# Altium PCB Arduino-DUE-V03.PcbDoc (part 2 of 2)
Units mil, origin at the board's own origin, x right, y up, seen from the top; angles counter-clockwise.
Board outline 4000 x 2100 mil, 2 copper layers (Top, Bottom), stack 65.748 mil thick; 128 components, 163 nets, 632 pads, 387 vias.
Unrouted connection lines stored in the file: 4.
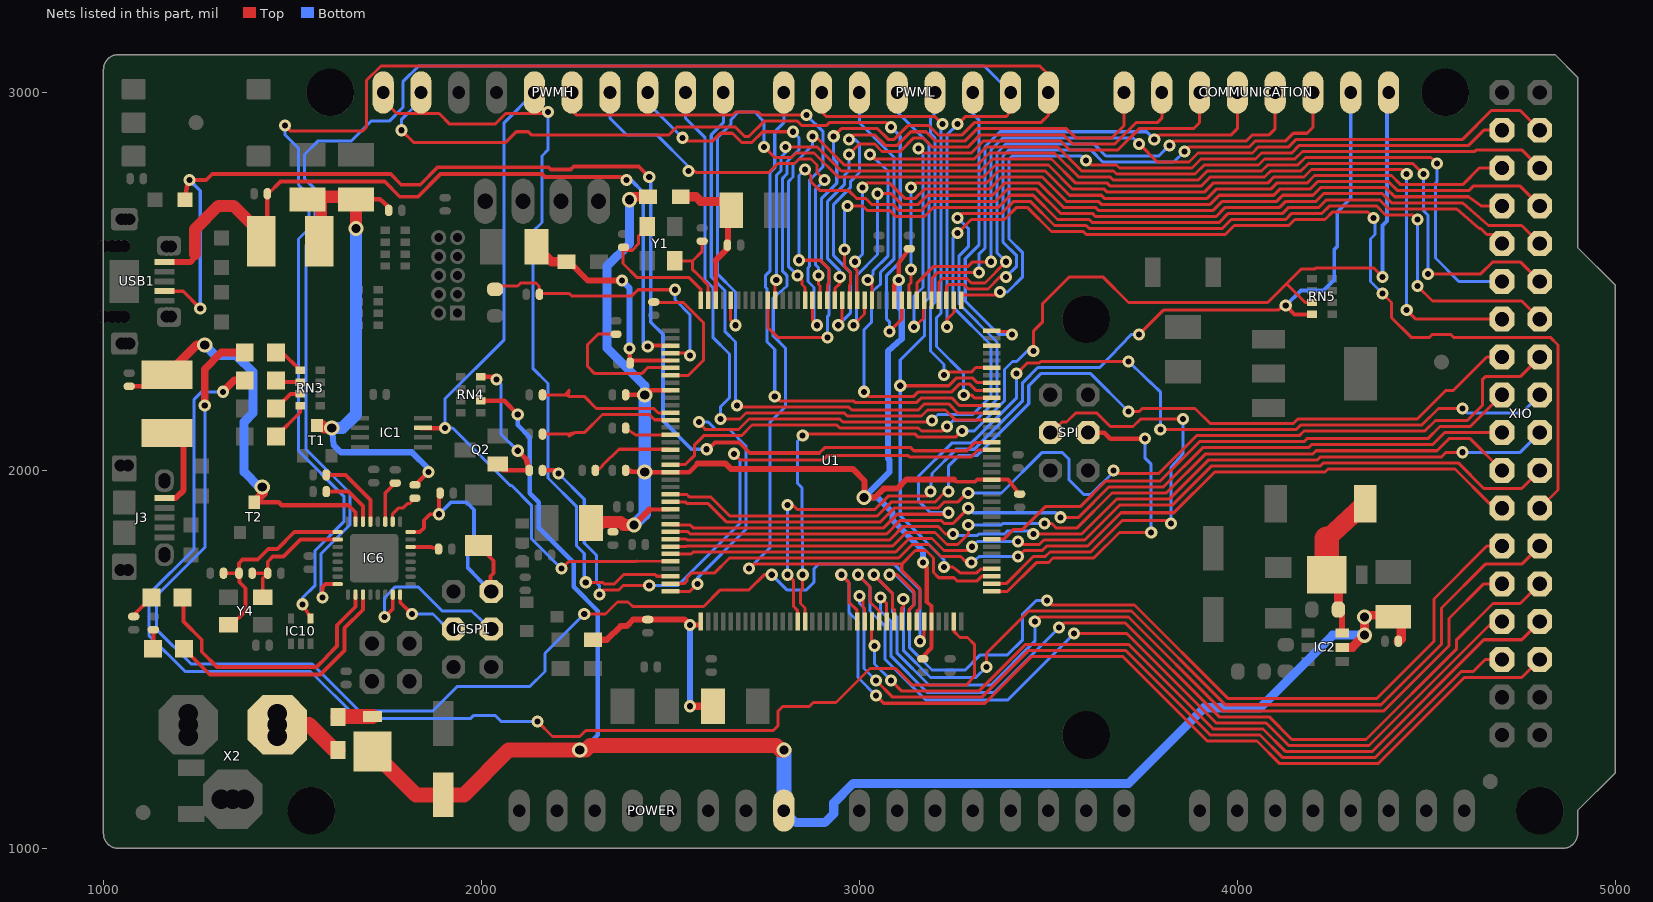
[diagram p2: the nets of this part, all layers, seen from the top]

## Via types
v1: diameter 32/32 (per signal layer), hole 16, Top to Bottom, 323 vias
v2: diameter 40/40 (per signal layer), hole 24, Top to Bottom, 64 vias

## Nets (pads, with @x,y where several pads share a name; then routed paths per layer and width w, separated by ;. In a path a pad name is that pad's centre, name@x,y a point inside that pad or via, vN(x,y) a via of type N, cw(c..) or ccw(c..) an arc to the next point about the centre after c; other vN are vias at no path point) (continued)
MOSI: SPI.4 U1.109 | length 903.2
  Top w8: U1.109@3350.2,1680.51 3352,1680 3392,1680 3468,1756 3500,1756 3512,1768 3620,1768 3688,1836 v1(3772,1836) ; SPI.4@3604,2100 SPI.4@3605,2100 3605,2101 SPI.4@3604,2100
  Top w12: SPI.4@3604,2100 3648,2100 3664,2084 v1(3756,2084)
  Bottom w8: v1(3756,2084) 3756,2032 3772,2016 v1(3772,1836)
MOSI2: IC6.16 ICSP1.4 | length 190.9
  Top w10: IC6.16@1784.9,1671.54 1784.9,1651.1 v1(1816,1620)
  Bottom w8: v1(1816,1620) 1872,1620 1912,1580 ICSP1.4@1925.94,1580
N$1: IC6.26 R21.1 | length 96.7
  Top w8: IC6.26@1765.21,1864.46 1765.21,1885.21 1780,1900 1792,1900 1804,1912 1809.59,1912 R21.1@1824,1926.5
N$2: L.A RN3.3 | length 79.9
  Top w10: L.A@1456.34,2164 1494.59,2202.25 RN3.3@1520.43,2202.25
N$3: ON.A RN3.4 | length 107.3
  Top w10: ON.A@1456.34,2090 1520.43,2154.09 RN3.4@1520.43,2170.76
N$4: R15.2 RX1.A | length 73.4
  Top w10: R15.2@1080,1613.5 1080,1617.34 RX1.A@1126.66,1664 1128,1664 RX1.A@1126.41,1665.59
N$5: R8.2 U1.51 | length 123.9
  Top w8: R8.2@2381.5,2112 2407.69,2093.9 U1.51@2499.8,2093.9
N$6: Q2.1 R3.2 RN4.8 | length 416.6
  Top w8: RN4.8@1998.57,2247.24 RN4.8@2000,2248
  Top w11: Q2.1@2043.31,2016.6 2040,2015.91 2040,2016 2056,2000 Q2.1@2068,2000
  Top w12: RN4.8@2000,2248 2032,2248 v1(2040,2240) ; Q2.1@2068,2000 R3.2@2126.5,2000 R3.2@2128,2000
  Top w14: v1(2096,2052) 2118.41,2029.59 R3.2@2126.5,2000
  Bottom w8: v1(2040,2240) 2052,2228 2052,2096 v1(2096,2052)
N$7: R4.1 U1.53 | length 222.4
  Top w8: R4.1@2301.5,2000 2308,2000 2320,2012 2320,2014 2364,2056 2496,2056 U1.53@2499.8,2054.53
N$10: D5.P$2 L6.1 | length 92.7
  Top w40: L6.1@1620,1347.31 1621.65,1348.96 D5.P$2@1712,1348.96
N$11: R5.2 U1.43 | length 380.5
  Top w8: R5.2@2456,2445.5 R5.2@2446.5,2444 ; U1.43@2499.8,2251.38 2547.38,2251.38 2588,2292 2588,2390 2534,2444 R5.2@2446.5,2444 ; R5.2@2446,2444 R5.2@2446.5,2444 ; R5.2@2446,2444 R5.2@2446.5,2444 ; R5.2@2446,2444 R5.2@2446.5,2444 ; R5.2@2446,2444 R5.2@2446.5,2444 ; R5.2@2446,2444 R5.2@2446.5,2444 ; R5.2@2446,2444 R5.2@2446.5,2444 ; R5.2@2446,2444 R5.2@2446.5,2444 ; R5.2@2446,2444 R5.2@2446.5,2444
N$12: R6.2 U1.42 | length 378.6
  Top w8: R6.2@2356,2360.5 2308.5,2360.5 2280,2332 2280,2276 2300,2256 2424,2256 2440,2272 2496,2272 U1.42@2499.8,2271.06
N$14: R14.2 TX1.A | length 51.1
  Top w10: TX1.A@1130.66,1528 1132,1529.34 R14.2@1132,1578.5
N$54: RN3.1 RX.A | length 83.6
  Top w10: RX.A@1456.34,2312 1471.09,2313.24 RN3.1@1520.43,2265.24
N$55: RN3.2 TX.A | length 52.3
  Top w10: TX.A@1468.09,2233.75 RN3.2@1520.43,2233.75
PIN22: U1.1 XIO.3 | length 1886.7
  Top w8: U1.1@3269.49,2450.2 3268,2464 3364,2464 v1(3372,2472) ; v1(3600,2820) 3612,2808 3680,2808 3688,2800 3880,2800 3904,2824 4048,2824 4064,2840 4144,2840 4164,2860 4612,2860 4652,2900 XIO.3@4700,2900
  Bottom w8: v1(3372,2472) 3392,2472 3432,2512 3432,2576 3396,2612 3396,2824 3404,2832 3588,2832 v1(3600,2820)
PIN23: U1.7 XIO.4 | length 2130.1
  Top w8: U1.7@3151.38,2450.2 3152,2456 3152,2495 3197,2540 3288,2540 3300,2552 v1(3348,2552) ; v1(3740,2864) 3788,2816 3872,2816 3896,2840 4040,2840 4056,2856 4136,2856 4156,2876 4596,2876 4672,2952 4748,2952 XIO.4@4800,2900
  Bottom w8: v1(3348,2552) 3348,2848 3380,2880 3724,2880 v1(3740,2864)
PIN24: U1.8 XIO.5 | length 1964.7
  Top w8: U1.8@3131.69,2450.2 3131.69,2491.69 3136,2496 v1(3136,2532) ; v1(3136,2748) 3148,2760 3336,2760 3368,2792 3492,2792 3556,2728 3640,2728 3648,2720 3920,2720 3944,2744 4088,2744 4104,2760 4184,2760 4204,2780 4408,2780 4432,2756 4596,2756 4640,2800 XIO.5@4700,2800
  Bottom w8: v1(3136,2532) v1(3136,2748)
PIN25: U1.13 XIO.6 | length 2300.3
  Top w8: v1(3022,2504) 3033,2493 3033,2455 U1.13@3033.27,2450.2 ; v1(3028,2836) 3040,2824 3304,2824 3336,2856 3524,2856 3588,2792 3672,2792 3680,2784 3888,2784 3912,2808 4056,2808 4072,2824 4152,2824 4172,2844 4628,2844 4632,2848 4752,2848 XIO.6@4800,2800
  Bottom w8: v1(3022,2504) 3036,2518 3036,2528 3076,2568 3076,2792 v1(3028,2836)
PIN26: U1.14 XIO.7 | length 2212.4
  Top w8: v1(2984,2384) 3013.58,2413.58 U1.14@3013.58,2450.2 ; v1(3048,2732) 3084,2732 3112,2704 3156,2704 3180,2728 3352,2728 3384,2760 3476,2760 3540,2696 3624,2696 3632,2688 3936,2688 3960,2712 4104,2712 4120,2728 4200,2728 4220,2748 4392,2748 4416,2724 4612,2724 4644,2700 XIO.7@4700,2700
  Bottom w8: v1(2984,2384) 2992,2392 2992,2515 3048,2571 v1(3048,2732)
PIN27: U1.15 XIO.8 | length 2236.7
  Top w8: v1(2988,2552) 2988,2535 2993.9,2529.1 U1.15@2993.9,2450.2 U1.15@2993.9,2449.9 ; v1(3008,2748) 3020,2760 3080,2760 3120,2720 3148,2720 3172,2744 3344,2744 3376,2776 3484,2776 3548,2712 3632,2712 3640,2704 3928,2704 3952,2728 4096,2728 4112,2744 4192,2744 4212,2764 4400,2764 4424,2740 4612,2740 4624,2752 4748,2752 XIO.8@4800,2700
  Bottom w8: v1(2988,2552) 3008,2572 v1(3008,2748)
PIN28: U1.16 XIO.9 | length 2132.1
  Top w8: v1(2960,2584) 2960,2540 2976.21,2523.79 2976,2519.79 2976,2492 2974,2490 2974,2448.2 U1.16@2974.21,2450.2 ; v1(2968,2700) 3008,2700 3020,2688 3080,2688 3096,2672 3172,2672 3196,2696 3368,2696 3400,2728 3460,2728 3524,2664 3608,2664 3616,2656 3952,2656 3976,2680 4120,2680 4136,2696 4216,2696 4236,2716 4376,2716 4400,2692 4580,2692 4640,2640 4644,2640 4660,2624 4676,2624 XIO.9@4700,2600
  Bottom w8: v1(2960,2584) 2960,2692 v1(2968,2700)
PIN29: U1.19 XIO.10 | length 2548.9
  Top w8: v1(2840,2556) 2896,2556 2920,2532 2920,2496 2915.16,2491.16 U1.19@2915.16,2450.2 ; v1(2856,2796) 2872,2780 2872,2764 2896,2740 2972,2740 2992,2720 3016,2720 3032,2704 3088,2704 3104,2688 3164,2688 3188,2712 3360,2712 3392,2744 3468,2744 3532,2680 3616,2680 3624,2672 3944,2672 3968,2696 4112,2696 4128,2712 4208,2712 4228,2732 4384,2732 4408,2708 4596,2708 4664,2648 4752,2648 XIO.10@4800,2600
  Bottom w8: v1(2840,2556) 2840,2780 v1(2856,2796)
PIN30: U1.22 XIO.11 | length 2696.6
  Top w8: v1(2836,2516) 2848,2504 2848,2492 2856,2484 U1.22@2856,2448 ; v1(2876,2884) 2884,2884 2960,2808 3312,2808 3344,2840 3516,2840 3580,2776 3664,2776 3672,2768 3896,2768 3920,2792 4064,2792 4080,2808 4160,2808 4180,2828 4512,2828 v1(4528,2812) ; U1.22@2856,2448 U1.22@2856.1,2450.2 2856.1,2448.1 U1.22@2856,2448
  Bottom w8: v1(2836,2516) 2812,2540 2812,2764 2824,2776 2824,2808 2876,2860 v1(2876,2884) ; v1(4528,2812) 4528,2764 4524,2760 4524,2562 4586,2500 XIO.11@4700,2500
PIN31: U1.26 XIO.12 | length 2810.8
  Top w8: U1.26@2777.36,2450.2 2777,2461 2777,2501 v1(2780,2504) ; v1(2804,2856) 2888,2856 2952,2792 3320,2792 3352,2824 3508,2824 3572,2760 3656,2760 3664,2752 3904,2752 3928,2776 4072,2776 4088,2792 4168,2792 4188,2812 4464,2812 v1(4492,2784) ; v1(4504,2520) 4644,2520 4676,2552 4748,2552 XIO.12@4800,2500
  Bottom w8: v1(2780,2504) 2780,2780 2792,2792 2792,2828 2804,2840 v1(2804,2856) ; v1(4492,2784) 4492,2688 4504,2676 v1(4504,2520)
PIN32: U1.32 XIO.13 | length 3265.4
  Top w8: U1.32@2659.25,2450.2 2659.25,2396.75 v1(2672,2384) ; v1(2748,2856) 2776,2828 2820,2828 2832,2840 2880,2840 2944,2776 3328,2776 3360,2808 3500,2808 3564,2744 3648,2744 3656,2736 3912,2736 3936,2760 4080,2760 4096,2776 4176,2776 4196,2796 4436,2796 v1(4448,2784) ; v1(4448,2424) 4472,2400 XIO.13@4700,2400 XIO.13@4704,2400
  Bottom w8: v1(2672,2384) 2672,2472 2624,2520 2624,2880 2660,2916 2660,2928 2680,2948 2724,2948 2748,2920 v1(2748,2856) ; v1(4448,2424) v1(4448,2784)
PIN33: U1.55 XIO.14 | length 3348.4
  Top w8: U1.55@2499.8,2015.16 2504,2016 2540,2016 2564,2040 2564,2068 2588,2092 2688,2092 2716,2120 2940,2120 2948,2112 3156,2112 3164,2104 3220,2104 v1(3232,2116) ; v1(3260,2668) 3272,2680 3376,2680 3408,2712 3452,2712 3516,2648 3600,2648 3608,2640 3960,2640 3984,2664 4128,2664 4144,2680 4224,2680 4244,2700 4368,2700 4392,2676 4464,2676 v1(4476,2664) ; v1(4476,2488) 4516,2448 4752,2448 XIO.14@4800,2400
  Bottom w8: v1(3232,2116) 3248,2132 3308,2132 3364,2188 3364,2340 3264,2440 3264,2568 3288,2592 3288,2640 v1(3260,2668) ; v1(4476,2488) v1(4476,2664)
PIN34: U1.59 XIO.15 | length 2581.3
  Top w8: U1.59@2499.8,1936.42 2504,1936 2544,1936 2550,1930 2606,1930 2656,1880 3048,1880 3084,1916 3200,1916 3228,1944 v1(3236,1944) ; v1(3712,2156) 3740,2156 3748,2164 3888,2164 3928,2124 4148,2124 4160,2136 4476,2136 4552,2212 4572,2212 4660,2300 XIO.15@4700,2300
  Bottom w8: v1(3236,1944) 3236,2012 3264,2040 3312,2040 3448,2176 3448,2224 3480,2256 3612,2256 v1(3712,2156)
PIN35: U1.60 XIO.16 | length 2676
  Top w8: U1.60@2499.8,1916.73 2539.27,1916.73 2544,1912 2600,1912 2648,1864 3056,1864 3092,1900 3208,1900 3224,1916 3260,1916 3284,1940 v1(3288,1940) ; v1(3672,2000) 3680,1992 3792,1992 3892,2092 4164,2092 4176,2104 4496,2104 4524,2132 4608,2132 4648,2172 4648,2240 4656,2248 4748,2248 XIO.16@4800,2300
  Bottom w8: v1(3288,1940) 3376,1940 3484,2048 3536,2048 3554,2030 3554,1976 3574.67,1954.8 3593.47,1936 3612,1936 3672,1996 v1(3672,2000)
PIN36: U1.116 XIO.17 | length 1508.5
  Top w8: U1.116@3350.2,1818.31 3350.2,1817.8 3354,1818 3382,1818 3408,1844 3432,1844 3492,1904 3584,1904 3652,1972 3796,1972 3900,2076 4176,2076 4184,2084 4504,2084 4536,2116 4616,2116 XIO.17@4700,2200
PIN37: U1.63 XIO.18 | length 2901.1
  Top w8: U1.63@2499.8,1857.68 2504,1856 2552,1856 2560,1848 3064,1848 3100,1884 3232,1884 v1(3236,1888) ; v1(3416,2256) 3444,2284 3476,2284 3480,2288 v1(3712,2288) ; v1(3796,2108) 4156,2108 4168,2120 4488,2120 4532,2164 v1(4596,2164)
  Bottom w8: v1(3236,1888) 3188,1888 3156,1920 3156,1984 3244,2072 3296,2072 3416,2192 v1(3416,2256) ; v1(3712,2288) 3796,2208 v1(3796,2108) ; v1(4596,2164) 4608,2152 4752,2152 XIO.18@4800,2200
PIN38: U1.64 XIO.19 | length 2340.2
  Top w8: U1.64@2499.8,1837.99 2546.01,1837.99 2552,1832 3072,1832 3108,1868 3216,1868 3224,1860 3248,1860 v1(3288,1900) ; v1(3532,1876) 3580,1876 3660,1956 3804,1956 3908,2060 4188,2060 4196,2068 4516,2068 4548,2100 XIO.19@4700,2100
  Bottom w8: v1(3288,1900) 3300,1888 3520,1888 v1(3532,1876)
PIN39: U1.65 XIO.20 | length 2445.3
  Top w8: U1.65@2499.8,1818.31 2541.69,1818.31 2544,1816 3080,1816 3116,1852 3208,1852 3228,1832 v1(3248,1832) ; v1(3460,1832) 3588,1832 3680,1924 3820,1924 3924,2028 4212,2028 4220,2036 4540,2036 4552,2048 v1(4596,2048)
  Bottom w8: v1(3248,1832) 3252,1832 3256,1828 3312,1828 3316,1832 3384,1832 3392,1840 3452,1840 v1(3460,1832) ; v1(4596,2048) 4748,2048 XIO.20@4800,2100
PIN40: U1.66 XIO.21 | length 2403.7
  Top w8: U1.66@2499.8,1798.62 2542.62,1798.62 2544,1800 3088,1800 3124,1836 3200,1836 3232,1804 3260,1804 3288,1832 v1(3288,1856) ; v1(3490,1860) 3508,1860 3520,1848 3576,1848 3668,1940 3812,1940 3916,2044 4200,2044 4208,2052 4528,2052 4560,2084 4616,2084 XIO.21@4700,2000
  Bottom w8: v1(3288,1856) 3376,1856 3380,1860 v1(3490,1860)
PIN41: U1.67 XIO.22 | length 2481.2
  Top w8: U1.67@2499.8,1778.94 2554.94,1778.94 2560,1784 3096,1784 3132,1820 3192,1820 3224,1788 3288,1788 v1(3298,1798) ; v1(3420,1812) 3428,1804 3476,1804 3488,1816 3596,1816 3688,1908 3828,1908 3932,2012 4220,2012 4228,2020 4584,2020 4652,1952 4752,1952 XIO.22@4800,2000
  Bottom w8: v1(3298,1798) 3312,1812 v1(3420,1812)
PIN42: U1.71 XIO.23 | length 2412.6
  Top w8: U1.71@2499.8,1700.2 2536.2,1700.2 2544,1708 2544,1716 2556,1728 2616,1728 2656,1768 3104,1768 3140,1804 3184,1804 3216,1772 3268,1772 3284,1756 v1(3296,1756) ; v1(3420,1772) 3436,1788 3484,1788 3496,1800 3604,1800 3692,1888 3832,1888 3940,1996 4232,1996 4240,2004 4576,2004 4668,1912 4688,1912 XIO.23@4700,1900
  Bottom w8: v1(3296,1756) 3316,1772 v1(3420,1772)
PIN43: U1.72 XIO.24 | length 4370.4
  Top w8: U1.72@2499.8,1680.51 2496,1680 2552,1680 v1(2572,1700) ; v1(2576,2128) 2592,2108 2680,2108 2708,2136 2948,2136 2956,2128 3188,2128 v1(3192,2132) ; v1(3260,2628) 3296,2664 3384,2664 3416,2696 3444,2696 3508,2632 3592,2632 3600,2624 3968,2624 3992,2648 4136,2648 4152,2664 4232,2664 4252,2684 4344,2684 v1(4360,2668) ; v1(4384,2468) 4408,2444 4408,2404 4460,2352 4508,2352 4516,2360 4564,2360 4572,2352 4828,2352 4848,2332 4848,1948 XIO.24@4800,1900
  Bottom w8: v1(2572,1700) 2572,1716 2700,1844 2700,2064 2656,2108 2620,2108 2600,2128 v1(2576,2128) ; v1(3192,2132) 3208,2148 3300,2148 3348,2196 3348,2332 3248,2432 3248,2616 v1(3260,2628) ; v1(4360,2668) 4364,2664 4364,2624 4352,2612 4352,2500 v1(4384,2468)
PIN44: U1.101 XIO.25 | length 2449.9
  Top w8: v1(3080,1724) 3100,1724 3144,1680 3144,1644 3131.69,1631.69 U1.101@3131.69,1599.8 ; v1(3496,1656) 3508,1644 3728,1644 3976,1396 4368,1396 4520,1548 4520,1660 4660,1800 XIO.25@4700,1800
  Bottom w8: v1(3080,1724) 3096,1724 3144,1676 3144,1644 3132,1632 3132,1532 3192,1472 3280,1472 3320,1512 3392,1512 3432,1552 3432,1620 3468,1656 v1(3496,1656)
PIN45: U1.100 XIO.26 | length 2338.6
  Top w8: U1.100@3112.01,1599.8 3112,1600 3112,1636 3116,1640 v1(3116,1660) ; v1(3336,1480) 3336,1516 3448,1628 3720,1628 3968,1380 4380,1380 4540,1540 4540,1636 4656,1752 4752,1752 XIO.26@4800,1800
  Bottom w8: v1(3116,1660) 3116,1524 3188,1452 3308,1452 v1(3336,1480)
PIN46: U1.99 XIO.27 | length 2404.3
  Top w8: v1(3038,1724) 3088,1674 3088,1636 3092.32,1631.68 U1.99@3092.32,1599.8 ; v1(3464,1600) 3476,1612 3712,1612 3960,1364 4388,1364 4560,1536 4560,1608 4652,1700 XIO.27@4700,1700
  Bottom w8: v1(3038,1724) 3088,1674 3088,1624 3100,1612 3100,1516 3184,1432 3348,1432 3464,1548 v1(3464,1600)
PIN47: U1.98 XIO.28 | length 2383.2
  Top w8: v1(3056,1664) 3072,1648 3072,1600 U1.98@3072.64,1599.8 ; v1(3528,1584) 3540,1596 3704,1596 3952,1348 4084,1348 4144,1288 4340,1288 4580,1528 4580,1552 4676,1648 4748,1648 XIO.28@4800,1700
  Bottom w8: v1(3056,1664) 3056,1628 3084,1600 3084,1508 3180,1412 3356,1412 v1(3528,1584)
PIN48: U1.97 XIO.29 | length 2409.7
  Top w8: v1(2996,1724) 3028,1692 3028,1652 3052.95,1627.05 U1.97@3052.95,1599.8 ; v1(3568,1568) 3708,1568 3944,1332 4076,1332 4136,1272 4348,1272 4676,1600 XIO.29@4700,1600
  Bottom w8: v1(2996,1724) 3028,1692 3028,1628 3068,1588 3068,1500 3176,1392 3392,1392 v1(3568,1568)
PIN49: U1.96 XIO.30 | length 2216.5
  Top w8: U1.96@3033.27,1599.8 3032,1592 3032,1544 v1(3040,1536) ; v1(3084,1444) 3112,1416 3316,1416 3440,1540 3712,1540 3936,1316 4068,1316 4128,1256 4356,1256 4652,1552 4752,1552 XIO.30@4800,1600
  Bottom w8: v1(3040,1536) 3040,1488 v1(3084,1444)
PIN50: U1.95 XIO.31 | length 2266.8
  Top w8: v1(3000,1668) 3009.58,1658.58 3009.58,1638.42 3013,1635 U1.95@3013.58,1599.8 ; v1(3044,1444) 3088,1400 3324,1400 3448,1524 3704,1524 3928,1300 4060,1300 4120,1240 4364,1240 4592,1468 4624,1468 4656,1500 XIO.31@4700,1500
  Bottom w8: v1(3000,1668) 3000,1648 3012,1636 3012,1476 v1(3044,1444)
PIN51: U1.94 XIO.32 | length 2549
  Top w8: v1(2952,1724) 2972,1704 2972,1652 2993.9,1630.1 U1.94@2993.9,1599.8 U1.94@2992.2,1599.8 ; v1(3044,1404) 3064,1384 3332,1384 3456,1508 3696,1508 3920,1284 4052,1284 4112,1224 4372,1224 4600,1452 4752,1452 XIO.32@4800,1500
  Bottom w8: v1(2952,1724) 2972,1704 2972,1624 2996,1600 2996,1452 v1(3044,1404)
PWM2: PWML.3 U1.144 | length 807.7
  Top w8: U1.144@3350.2,2369.49 3344,2368 3396,2368 v1(3404,2360)
  Bottom w8: PWML.3@3300,3004 PWML.3@3300,3000 3300,2944 3316,2928 3316,2596 3280,2560 3280,2448 3368,2360 v1(3404,2360)
PWM3: PWML.4 U1.139 | length 912.4
  Top w8: v1(3224,2252) 3232,2260 3296,2260 3308,2272 3344,2272 U1.139@3350.2,2271.06
  Bottom w8: PWML.4@3200,3000 3200,2944 3188,2932 3188,2892 3200,2880 3200,2444 3188,2432 3188,2316 3224,2280 v1(3224,2252)
PWM5: PWML.6 U1.136 | length 1227.6
  Top w8: v1(3012,2208) 3024,2196 3144,2196 3156,2208 3244,2208 3264,2228 3292,2228 3308.01,2212.01 U1.136@3350.2,2212.01
  Bottom w8: PWML.6@3000,3000 3000,2920 3092,2828 3092,2560 3056,2524 3056,2492 3032,2472 3032,2392 3012,2372 v1(3012,2208)
PWM6: PWML.7 U1.135 | length 1214.6
  Top w8: PWML.7@2900,3000 2900,2949 2913,2936 3200,2936 v1(3220,2916) ; v1(3276,2200) 3296,2200 3304,2192 3344,2192 U1.135@3350.2,2192.32
  Bottom w8: v1(3220,2916) 3216,2912 3216,2416 3204,2404 3204,2328 3276,2256 v1(3276,2200)
PWM7: PWML.8 U1.134 | length 1428.2
  Top w8: v1(2776,2196) 2788,2184 2984,2184 2988,2180 3152,2180 3164,2192 3244,2192 3264,2172 3348,2172 3348.64,2172.64 U1.134@3350.2,2172.64
  Bottom w8: v1(2776,2196) 2776,2320 2756,2340 2756,2480 2752,2484 2752,2516 2764,2528 2764,2788 2776,2800 2776,2896 2800,2920 PWML.8@2800,3000
PWM8: PWMH.1 U1.133 | length 1565.2
  Top w8: v1(2676,2172) 2680,2168 2972,2168 2980,2160 3156,2160 3172,2176 3236,2176 3260,2152 3344,2152 U1.133@3350.2,2152.95
  Bottom w8: PWMH.1@2640,3000 2640,2920 2608,2888 2608,2512 2644,2476 2644,2368 2672,2340 2672,2176 v1(2676,2172)
PWM9: PWMH.2 U1.132 | length 1668
  Top w8: v1(2632,2136) 2684,2136 2700,2152 2960,2152 2968,2144 3164,2144 3180,2160 3228,2160 3255,2133 3336,2133 3339.73,2133.27 U1.132@3350.2,2133.27
  Bottom w8: PWMH.2@2540,3000 2540,2932 2592,2880 2592,2504 2612,2484 2612,2352 2656,2308 2656,2192 2632,2168 v1(2632,2136)
PWM11: PWMH.4 U1.20 | length 1085.2
  Top w8: v1(2548,2792) 2564,2792 2568,2788 2760,2788 2784,2812 2828,2812 2840,2824 2872,2824 2888,2808 2888,2788 v1(2908,2768) ; v1(2892,2516) 2892,2492 2896,2488 2896,2456 U1.20@2895.47,2450.2
  Bottom w8: PWMH.4@2340,3000 2340,2932 2384,2888 2464,2888 2548,2804 v1(2548,2792) ; v1(2892,2516) 2892,2536 2884,2544 2884,2744 v1(2908,2768)
PWM12: PWMH.5 U1.21 | length 1351.6
  Top w8: PWMH.5@2240,3000 2240,2952 2252,2940 2664,2940 2672,2948 2732,2948 2740,2940 v1(2860,2940) ; U1.21@2875.79,2450.2 2875.79,2396.21 v1(2888,2384)
  Bottom w8: v1(2860,2940) 2904,2896 2904,2804 2868,2768 2868,2540 2864,2536 2864,2500 2880,2484 2880,2392 v1(2888,2384)
PWM13: IC1.3 PWMH.6 U1.68 | length 1864.5
  Top w8: IC1.3@1840,2112 IC1.3@1845.19,2112.76 ; v1(2212,1740) 2231.25,1759.25 2408.75,1759.25 2412,1760 U1.68@2499.8,1759.25
  Top w12: IC1.3@1840,2112 v1(1904,2112)
  Bottom w8: PWMH.6@2140,3000 2060,2920 2060,2346 1904,2190 v1(1904,2112) 1924,2112 2076,1960 2080,1960 2132,1908 2132,1820 v1(2212,1740)
RD+: IC6.29 R20.1 | length 201.4
  Top w10: R20.1@1589.5,1988 1640,1988 1706.16,1921.84 IC6.29@1706.16,1864.46
RD-: IC6.30 R19.1 | length 156
  Top w10: R19.1@1589.5,1944 1589.59,1945.59 1592,1944 1648,1944 1686.47,1905.53 IC6.30@1686.47,1864.46
RESET2: D2.A IC6.24 ICSP1.5 R13.1 | length 669.1
  Top w10: IC6.24@1812.46,1836.9 1836.9,1836.9 1848,1848 1848,1868 1864,1884 v1(1888,1884) 1888,1938.41 R13.1@1890.5,1940 ; D2.A@1992,1801.07 2032,1761.07 2032,1728 2024,1720 2024,1680 ICSP1.5@2025.94,1680
  Bottom w10: v1(1888,1884) 1920,1916 1960,1916 1980,1896 1980,1816 1964,1800 1964,1742 ICSP1.5@2020,1684 ; ICSP1.5@2022,1682 ICSP1.5@2025.94,1680
  Bottom w12: ICSP1.5@2020,1684 ICSP1.5@2022,1682
RESET_CMD: IC6.22 R23.1 | length 74.7
  Top w10: IC6.22@1812.46,1797.53 1864.88,1797.53 R23.1@1886.5,1792
RX: IC10.4 PWML.1 U1.27 | length 5169.1
  Top w8: v1(1480.32,2912.63) 1495.43,2897.51 1685.51,2897.51 1696,2908 1696,3032 1734,3070 3477.24,3070 3500,3047.24 PWML.1@3500,3000 3500,2940 3480,2920 3304,2920 3272,2888 3208,2888 3184,2912 3128,2912 3092,2876 3076,2876 3048,2904 2952,2904 v1(2932,2884) ; U1.27@2757.68,2450.2 2757.68,2378.32 2784,2352 v1(2916,2352)
  Top w10: v1(1526.74,1645.8) 1549.21,1608.27 IC10.4@1547.76,1608.26
  Bottom w8: v1(1480.32,2912.63) 1480,2912.32 1480,2888 1516,2852 1516,2756 1544,2728 1544,2640 1516,2612 1516,2052 1636,1932 1636,1864 1560,1788 1560,1696 1526.74,1662.74 v1(1526.74,1645.8) ; v1(2916,2352) 2916,2408 2920,2412 2920,2532 2900,2552 2900,2720 2940,2760 2940,2816 2932,2824 v1(2932,2884)
RXD0: COMMUNICATION.2 U1.18 | length 1419.7
  Top w8: U1.18@2934.84,2450.2 2935,2481 2948,2494 v1(2948,2512) ; v1(2972,2836) 3000,2864 3040,2864 3060,2844 3108,2844 3144,2880 3168,2880 3192,2856 3288,2856 3320,2888 3540,2888 3564,2864 3676,2864 3732,2920 3788,2920 3800,2932 COMMUNICATION.2@3800,3000
  Bottom w8: v1(2948,2512) 2948,2528 2916,2560 2916,2712 2960,2756 2960,2780 2972,2792 v1(2972,2836)
RXD1: COMMUNICATION.4 U1.5 | length 1328
  Top w8: U1.5@3190.75,2450.2 3192,2456 3192,2508.69 3207.31,2524 v1(3316,2524) ; v1(3780,2876) 3792,2888 3984,2888 4000,2904 COMMUNICATION.4@4000,3000
  Bottom w8: v1(3316,2524) 3316,2572 3332,2588 3332,2856 3372,2896 3760,2896 v1(3780,2876)
RXD2: COMMUNICATION.6 U1.3 | length 1531
  Top w8: U1.3@3230.12,2450.2 3230.12,2486.12 3236,2492 3276,2492 3288,2480 3340,2480 3372,2512 v1(3388,2512) ; v1(3860,2844) 3872,2856 4032,2856 4048,2872 4128,2872 4148,2892 4184,2892 4200,2908 COMMUNICATION.6@4200,3000
  Bottom w8: v1(3388,2512) 3416,2540 3416,2568 3380,2604 3380,2832 3396,2848 3612,2848 3644,2816 3832,2816 v1(3860,2844)
RXL: RX.C U1.103 | length 3450.3
  Top w8: v1(2272,1620) 2328,1620 2360,1652 2388,1652 2400,1640 2588,1640 2632,1684 2708,1684 2748,1724 v1(2768,1724) ; v1(3160,1548) 3171.06,1555.06 U1.103@3171.06,1599.8 U1.103@3172,1599.8
  Top w20: v1(1268,2172) 1268,2268 1312,2312 RX.C@1373.66,2312
  Bottom w8: v1(1268,2172) 1268,1796 1140,1668 1140,1580 1232,1488 1552,1488 1676,1364 1872,1364 1936,1428 2128,1428 2168,1468 2168,1516 v1(2272,1620) ; v1(2768,1724) 2808,1684 2860,1684 2880,1704 2880,1740 2892,1752 3092,1752 3160,1684 v1(3160,1548)
RXL-U2: IC6.10 RX1.C | length 718.8
  Top w10: RX1.C@1209.34,1664 1212,1649.34 1212,1600 1260,1552 1260,1520 1300,1480 1564,1480 1590.55,1506.55 1590.55,1507.87 1618.11,1535.43 1618.11,1590.55 1666.79,1639.23 IC6.10@1666.79,1671.54
SCK2: IC6.15 ICSP1.3 | length 459.2
  Top w10: v1(1744,1612) 1765.21,1633.21 IC6.15@1765.21,1671.54
  Bottom w8: v1(1744,1612) 1744,1664 1772,1692 1832,1692 1896,1628 1974,1628 ICSP1.3@2025.94,1580
SCL0-3: COMMUNICATION.8 RN5.7 U1.87 | length 2990.6
  Top w8: v1(2850,1724) 2850,1686 2844,1680 2844,1648 2856,1636 2856,1600 U1.87@2856.1,1599.8 ; v1(2850,2092) 2854,2096 3148,2096 3156,2088 3254,2088 v1(3272,2104) ; v1(3460,2316) 3460,2368 3484,2392 3484,2440 3556,2512 3644,2512 3712,2444 4080,2444 4130,2494 ; RN5.7@4197.43,2444.25 4179.75,2444.25 4130,2494 ; v1(4384,2512) 4360,2536 4208,2536 4205.43,2533.43 4169.43,2533.43 4130,2494
  Bottom w8: v1(2850,1724) 2848,1954 2836,1966 2836,2078 v1(2850,2092) ; v1(3272,2104) 3304,2104 3384,2184 3384,2267 3405,2288 3416,2288 3444,2316 v1(3460,2316)
  Bottom w10: v1(4384,2512) 4384,2648 4396,2660 4396,2996 COMMUNICATION.8@4400,3000
SCL1: PWMH.10 U1.70 | length 2055.2
  Top w8: PWMH.10@1740,3000 1740,2980 1776,2944 1888,2944 1916,2916 2036,2916 2064,2944 2172,2944 v1(2176,2948) ; v1(2276,1704) 2320,1704 2324,1700 2352,1700 2376,1724 2460,1724 2464,1720 2499.69,1720 U1.70@2499.8,1719.88 U1.70@2496,1720
  Bottom w8: v1(2176,2948) 2176,2848 2160,2832 2160,2656 2136,2632 2136,2270 2176,2230 2176,1980 2252,1904 2252,1800 2272,1780 2272,1708 v1(2276,1704)
SDA0-3: COMMUNICATION.7 RN5.8 U1.86 | length 2674.5
  Top w8: v1(2810,1724) 2826,1708 2826,1640 2835.8,1630.2 U1.86@2835.8,1603.8 ; v1(2810,1908) 2824,1908 2836,1896 3040,1896 3076,1932 3180,1932 v1(3188,1944) ; U1.86@2836.42,1599.8 U1.86@2835.8,1603.8 ; U1.86@2838,1600 U1.86@2835.8,1603.8 ; v1(3740,2360) 3804,2424 4108,2424 4120,2436 v1(4128,2436)
  Top w10: v1(4128,2436) 4151.24,2412.76 RN5.8@4197.43,2412.76
  Bottom w8: v1(2810,1724) v1(2810,1908) ; v1(3188,1944) 3192,1992 3256,2056 3304,2056 3432,2184 3432,2232 3472,2272 3636,2272 3720,2360 v1(3740,2360)
  Bottom w10: v1(4128,2436) 4168,2476 4228,2476 4256,2504 4256,2584 4264,2592 4264,2684 4300,2720 COMMUNICATION.7@4300,3000
SDA1: PWMH.9 U1.9 | length 2159
  Top w8: v1(1788,2900) 1820,2868 2064,2868 2092,2896 2124,2896 2132,2888 2496,2888 2516,2908 2672,2908 2696,2884 2708,2884 2748,2924 2836,2924 2848,2912 2912,2912 2920,2920 3072,2920 v1(3084,2908) ; v1(3080,2368) 3112,2400 3112,2448 U1.9@3112.01,2450.2
  Bottom w8: v1(1788,2900) 1788,2928 1828,2968 1828,2992 1832,2996 PWMH.9@1840,3000 ; v1(3080,2368) 3080,2392 3072,2400 3072,2516 3108,2552 3108,2884 v1(3084,2908)
SPCK: SPI.3 U1.110 | length 1229.7
  Top w8: U1.110@3350.2,1700.2 3388.2,1700.2 3460,1772 3492,1772 3504,1784 3612,1784 3696,1868 3816,1868 v1(3824,1860) ; SPI.3@3505,2100 3536,2128 3548,2128 3572,2152 3628,2152 3664,2116 3724,2116 3744,2136 v1(3856,2136)
  Bottom w8: v1(3824,1860) 3824,2008 3856,2044 v1(3856,2136)
SS0/PWM10: PWMH.3 U1.102 U1.111 | length 2638.2
  Top w8: v1(2532,2880) 2536,2872 2612,2872 2632,2892 2664,2892 2688,2868 2716,2868 2744,2896 v1(2824,2896) ; v1(2708,1740) 2720,1752 3112,1752 ; U1.102@3151.38,1599.8 3152,1600 3152,1628 3160,1636 3160,1688 3112,1736 3112,1752 ; U1.111@3350.2,1719.88 3344,1720 3324,1720 3312,1708 3258,1708 3250,1716 3210,1716 3196,1730 3196,1768 3176,1788 3148,1788 3112,1752
  Bottom w8: PWMH.3@2440,3000 2440,2972 v1(2532,2880) ; v1(2708,1740) 2764,1796 2764,2128 2804,2168 2804,2324 2772,2356 2772,2456 2808,2488 2808,2516 2796,2528 2796,2772 2808,2784 2808,2816 2840,2848 2840,2880 v1(2824,2896)
SS1/PWM4: PWML.5 U1.112 U1.137 | length 1764.5
  Top w8: v1(3108,2224) 3236,2224 3256,2244 3300,2244 3312,2232 3344,2232 U1.137@3350.2,2231.69 ; v1(3224,1744) 3248,1744 3268,1728 3309,1728 3321.43,1739.57 U1.112@3350.2,1739.57
  Bottom w8: PWML.5@3100,3000 3104,3000 3104,2944 3184,2864 3184,2456 3172,2444 3172,2356 3108,2292 v1(3108,2224) 3108,1880 3224,1764 v1(3224,1744)
SS3: U1.142
SW: C42.2 D4.P$1 IC2.6 L4.P$1 | length 410.1
  Top w16: D4.P$1@4236.44,1724 D4.P$1@4267,1705.44 ; C42.2@4267,1632 4277.28,1625.72 IC2.6@4277.28,1569.4
  Top w24: C42.2@4267,1632 D4.P$1@4267,1705.44
  Top w50: 4236.44,1818.33 L4.P$1@4338.11,1912
  Top w66: D4.P$1@4236.44,1724 4236.44,1818.33
TX: IC6.8 PWML.2 U1.2 | length 4210.7
  Top w8: v1(3232,2380) 3231.8,2382.2 3231.8,2399.8 3250,2418 U1.2@3249.8,2450.2 ; v1(3260,2916) 3280,2936 3388,2936 3400,2948 PWML.2@3400,3000
  Top w10: v1(1580,1663.43) 1579.67,1691.76 1587.67,1699.1 IC6.8@1619.54,1699.1
  Bottom w8: v1(1580,1663.43) 1576,1667.43 1576,1780 1652,1856 1652,1940 1536,2056 1536,2596 1560,2620 1560,2744 1532,2772 1532,2836 1568,2872 1656,2872 1708,2924 1756,2924 1792,2960 1792,3028 1834,3070 3330,3070 PWML.2@3400,3000 ; v1(3232,2380) 3232,2888 v1(3260,2916)
TXD0: COMMUNICATION.1 U1.17 | length 1537.4
  Top w8: v1(2944,2384) 2954.53,2393.47 U1.17@2954.53,2450.2 ; v1(2972,2876) 2984,2888 3040,2888 3068,2860 3100,2860 3136,2896 3176,2896 3200,2872 3280,2872 3312,2904 3548,2904 3572,2880 3668,2880 3700,2912 COMMUNICATION.1@3700,3000
  Bottom w8: v1(2944,2384) 2976,2416 2976,2524 2932,2568 2932,2704 2976,2748 2976,2764 3000,2788 3000,2864 2988,2876 v1(2972,2876)
TXD1: COMMUNICATION.3 U1.6 | length 1452.1
  Top w8: v1(3144,2380) 3170,2402 3170,2450 3170.2,2450.2 U1.6@3171.06,2450.2 ; v1(3156,2852) 3168,2840 3296,2840 3328,2872 3532,2872 3556,2848 3684,2848 3740,2904 3884,2904 3900,2920 COMMUNICATION.3@3900,3000
  Bottom w8: v1(3144,2380) 3144,2460 3168,2484 3168,2840 v1(3156,2852)
TXD2: COMMUNICATION.5 U1.4 | length 1440.9
  Top w8: U1.4@3210.43,2450.2 3210.43,2498.43 3220,2508 3284,2508 3296,2496 3332,2496 v1(3388,2552) ; v1(3820,2860) 3832,2872 4024,2872 4040,2888 4084,2888 4100,2904 COMMUNICATION.5@4100,3000
  Bottom w8: v1(3388,2552) 3364,2576 3364,2840 3388,2864 3620,2864 3652,2832 3792,2832 v1(3820,2860)
TXL: TX.C U1.107 | length 3434
  Top w8: v1(2148,1336) 2188,1296 2260,1296 2276,1312 2772,1312 2784,1324 2784,1362 2798,1376 2868,1376 2878,1386 2938,1386 3028,1476 3096,1476 3140,1432 3284,1432 3304,1456 3304,1540 3286,1558 3266,1558 3249.8,1574.2 U1.107@3249.8,1599.8
  Top w20: v1(1316,2208) 1346,2238 TX.C@1373.66,2238
  Bottom w8: v1(1316,2208) 1260,2208 1240,2188 1240,1792 1120,1672 1120,1564 1216,1468 1548,1468 1672,1344 1972,1344 1980,1352 2036,1352 2052,1336 v1(2148,1336)
TXL-U2: IC6.11 TX1.C | length 647.1
  Top w10: TX1.C@1213.34,1528 1281.34,1460 1574.17,1460 1637.8,1523.62 1637.8,1582.68 1686.47,1631.35 IC6.11@1686.47,1671.54
UOTGID: U1.129 USB1.4 Z5.2 | length 3401.9
  Top w8: 2894,2046 2908,2060 3136,2060 3144,2052 3284,2052 3306.21,2074.21 U1.129@3350.2,2074.21
  Top w10: USB1.4@1160,2474 1172,2474 1211,2474 v1(1256,2428) ; USB1.4@1161.3,2474.41 USB1.4@1172.99,2474.41 ; v1(1228,2768) 1272,2768 1288,2784 1760,2784 1788,2756 1838,2756 1884,2802 2178,2802 2184,2796 2236,2796 2244,2804 2416,2804 v1(2444,2776) ; v1(2596,2056) 2600,2056 2618,2074 2682,2074 2710,2046 2894,2046
  Top w12: Z5.2@1215.37,2716 1223.37,2763.37 v1(1228,2768)
  Bottom w10: v1(1228,2768) 1256,2740 v1(1256,2428) ; v1(2444,2776) 2448,2772 2448,2392 2480,2360 2480,2132 2556,2056 v1(2596,2056)
UOTGVBOF: R3.1 U1.128 | length 1754
  Top w8: v1(2312,1672) 2324,1684 2364,1684 2376,1696 v1(2444,1696) ; v1(2668,2044) 2684,2028 2904,2028 2916,2040 3128,2040 3132,2036 3296,2036 3314,2054 3342,2054 U1.128@3350.2,2054.53
  Top w12: R3.1@2161.5,2000 2196,2000 v1(2204,1992)
  Bottom w8: v1(2204,1992) 2272,1924 2272,1808 2304,1776 2304,1704 2312,1696 v1(2312,1672) ; v1(2444,1696) 2520,1696 2684,1860 2684,2028 v1(2668,2044)
USBVCC: C27.+ C35.+ F1.1 R2.2 R21.2 T1.1 | length 1444.1
  Top w12: C27.+@1668,2716.94 1731.06,2716.94 1754.5,2697.5 R2.2@1754.5,2688 ; R21.2@1824,1961.5 1833.59,1969.59 v1(1860,1996)
  Top w16: C35.+@1539.57,2724.51 C35.+@1540,2716.94
  Top w30: T1.1@1565,2119 1566,2120 1576,2120 1584,2112 v2(1604,2112)
  Top w32: C35.+@1540,2716.94 1552.84,2724.51 1568,2724 C35.+@1576,2724 ; F1.1@1570.77,2606 1576,2614 C35.+@1576,2724 ; C27.+@1664,2720.94 C27.+@1668,2716.94 ; v2(1668,2640) C27.+@1668,2716.94 ; C35.+@1576,2724 1668,2724 C27.+@1668,2716.94
  Bottom w16: v2(1604,2112) 1608,2068 1628,2048 1816,2048 1860,2004 v1(1860,1996)
  Bottom w32: v2(1604,2112) 1632,2112 1668,2148 v2(1668,2640)
USBVCCU2: C28.1 F2.1 IC6.31 T2.1 | length 1096.5
  Top w10: 1648,1908 1666.79,1889.21 IC6.31@1666.79,1864.46
  Top w12: C28.1@1068,2222.5 1137.73,2222.5 F2.1@1168,2252.77 ; T2.1@1399,1916 1464,1916 1472,1908 1648,1908
  Top w24: F2.1@1168,2252.77 1247.23,2332 v2(1268,2332) ; T2.1@1399,1916 1423,1940 1423,1953 v2(1420,1956)
  Bottom w24: v2(1268,2332) 1296,2304 1352,2304 1396,2260 1396,2152 1372,2128 1372,1996 1412,1956 v2(1420,1956)
VBG: C25.1 R7.2 U1.40 | length 762.5
  Top w8: R7.2@2036,2479 2043,2479 2052,2488 2096,2488 2104,2496 2144,2496 2152,2488 2152,2467.5 C25.1@2153.5,2466 2163.59,2468 2232,2468 2238,2462 2398,2462 2414,2478 v1(2512,2478) ; U1.40@2499.8,2310.43 2505,2311 2545,2311 v1(2552,2304)
  Bottom w8: v1(2512,2478) 2512,2452 2552,2412 v1(2552,2304)
VDDANA: C3.+ C10.2 L1.2 U1.73 | length 597.2
  Top w8: U1.73@2579.51,1591 U1.73@2580.51,1599.8
  Top w12: v1(2552,1591) U1.73@2579.51,1591
  Top w16: L1.2@2295.31,1552 2332,1552 2368,1588 2384,1588 2401.5,1605.5 C10.2@2440,1605.5 2537.5,1605.5 v1(2552,1591)
  Top w20: v1(2552,1376) C3.+@2612.94,1376
  Bottom w16: v1(2552,1376) v1(2552,1591)
VDDOUT: C11.+ C12.2 C13.2 C14.2 C15.2 C16.2 C17.2 L5.1 U1.10 U1.45 U1.56 U1.61 U1.104 U1.124 | length 3971.4
  Top w8: C11.+@2280,1880 2282.06,1877.94 C11.+@2290.06,1861 ; C11.+@2288,1848 C11.+@2296,1856 ; C15.2@2381.5,2000 2392,2000 ; C14.2@2381.5,2200 2392,2200 ; L5.1@2432,2724 L5.1@2440.69,2724 ; U1.61@2496,1897 U1.61@2499.8,1897.05 U1.61@2504,1896 ; C16.2@3157.5,1508 C16.2@3168,1501.5 ; U1.124@3344,1976 U1.124@3350.2,1975.79 ; C17.2@3424,1936 C17.2@3424,1937.5
  Top w10: C12.2@2348,1837.5 2349.59,1853.59 2376,1856 ; 3250,1976 3252,1972 3258,1970 3306,1970 3312,1976 U1.124@3344,1976 ; U1.124@3350.2,1975.79 3393.8,1975.79 C17.2@3424,1937.5
  Top w11: C15.2@2381.5,2000 2396,2000 2396,1996 ; 2444,1896 2441,1897 U1.61@2496,1897 ; v2@2443.99,2212.01 U1.45@2499.8,2212.01 ; U1.10@3092.32,2450.2 3092.32,2492.32 v1(3104,2504) ; C16.2@3168,1501.5 3168,1508 3190.75,1530.75 U1.104@3190.75,1599.8 3190.75,1641.25 3178,1652
  Top w11.5: v2@2436.53,1995.47 U1.56@2499.8,1995.47 2549.47,1995.47
  Top w12: 2392,2200 v2(2432,2200) v2@2443.99,2212.01 ; 2396,1996 v2(2432,1996) v2@2436.53,1995.47 ; 2549.47,1995.47 2572,2018 ; v1(3104,2504) 3104,2548 C13.2@3132,2586.5 ; v1(3168,1756) 3178,1742 3178,1652
  Top w16: v2(2404,1856) 2444,1896 ; 2572,2018 2646,2018 2660,2004 2982,2004 3014,1972 3014,1926 v2(3012,1928) 3040,1928 3064,1952 3100,1952 3124,1976 3250,1976
  Top w24: v2(2392,2716) 2394,2724 2432,2724 L5.1@2432,2726
  Top w32: C11.+@2280,1880 2280,1856 2296,1856 2312,1856 2320,1864 2368,1864 2376,1856 v2(2404,1856)
  Bottom w16: v1(3104,2504) 3104,2432 3112,2424 3112,2348 3076,2316 3076,2032 3080,2028 3080,1996 v2(3012,1928) 3048,1928 3088,1888 3088,1868 3168,1788 v1(3168,1756)
  Bottom w24: v2(2392,2716) 2392,2600 2332,2540 2332,2324 2432,2224 v2(2432,2200)
  Bottom w32: v2(2404,1856) 2432,1884 v2(2432,1996) v2(2432,2200)
VDDOUTMI: C2.+ C9.2 L2.2 U1.41 | length 627.1
  Top w8: C2.+@2144,2568 2146.06,2565.94 C2.+@2146.06,2592 ; L2.2@2224.69,2552 L2.2@2232,2552
  Top w10: C9.2@2393.25,2290.75 2392,2290.75 2392,2288 C9.2@2393.5,2284
  Top w11: C9.2@2393.25,2290.75 U1.41@2499.8,2290.75
  Top w12: v1(2392,2322) 2392,2292 C9.2@2393.25,2290.75
  Top w16: L2.2@2232,2552 2282,2502 v1(2372,2502)
  Top w24: C2.+@2146.06,2592 2186.06,2552 L2.2@2224.69,2552
  Bottom w16: v1(2372,2502) 2392,2482 v1(2392,2322)
VDDPLL: C32.2 C33.+ L5.2 U1.34 | length 463.4
  Top w8: L5.2@2520,2724 L5.2@2527.31,2724 ; C33.+@2652,2680 C33.+@2664,2696 ; C33.+@2660.94,2688 C33.+@2664,2696 ; C33.+@2664,2720 2664,2704 C33.+@2664,2696
  Top w11: U1.34@2619.88,2450.2 2619.88,2555.88
  Top w16: 2619.88,2555.88 C32.2@2652,2588 ; C32.2@2650.5,2596 C32.2@2652,2588 ; C33.+@2652,2680 C32.2@2652,2588
  Top w24: L5.2@2520,2724 2568,2724 2580,2712 2656,2712 C33.+@2664,2704
VIN: C41.+ D5.P$1 IC2.5 PC1.+ POWER.8 R10.1 RN4.6 | length 4512.7
  Top w12: RN4.6@1998.57,2184.25 2060,2184 v1(2096,2148)
  Top w16: v2(4336,1612) v2@4344.94,1616.94
  Top w24: IC2.5@4277.28,1532 4304,1532 v2(4336,1564) v2(4336,1612) ; v2@4344.94,1616.94 C41.+@4412,1612.94 4433.59,1591.35 4433.59,1553.59 4428,1548 R10.1@4425.5,1548
  Top w40: D5.P$1@1712,1256.44 1826.93,1141.51 PC1.+@1899,1141.51 1953.51,1141.51 2072,1260 v2(2260,1260) 2276,1260 2288,1272 2780,1272 2792,1260 v2(2800,1260)
  Bottom w12: v1(2096,2148) 2096,2120 2128,2088 2128,1940 2152,1916 2152,1848 2244,1756 2244,1692 2308,1628 2308,1300 2284,1276 v2(2260,1260)
  Bottom w24: POWER.8@2800,1100 2832,1068 2908,1068 2932,1092 2932,1120 2984,1172 3712,1172 3912,1372 4060,1372 4252,1564 v2(4336,1564)
  Bottom w40: POWER.8@2800,1100 v2(2800,1260)
VIN+: L6.2 X2.2 | length 188.3
  Top w40: X2.2@1460,1327 1461,1328 1544,1328 1611.31,1260.69 L6.2@1620,1260.69
VUCAP: C38.1 IC6.27 | length 113
  Top w10: IC6.27@1745.53,1864.46 1745.53,1939.94 C38.1@1772,1966.5
XIN: C22.1 U1.36 Y1.1 | length 439.2
  Top w8: C22.1@2376,2590.5 C22.1@2374.5,2582.5 ; Y1.1@2428,2628 Y1.1@2436,2644 ; U1.36@2580.51,2450.2 2580.51,2479.49 2550,2510 2412,2510 2374.5,2547.5 C22.1@2374.5,2582.5 ; C22.1@2374.5,2582.5 2399.81,2582.5 2416,2600 2416,2620 Y1.1@2438.58,2645.28 ; Y1.1@2436,2644 Y1.1@2438.58,2645.28 ; Y1.1@2436,2644 2440,2648 Y1.1@2438.58,2645.28
XIN32: C24.1 U1.48 | length 391.7
  Top w8: C24.1@2161.5,2200 2221.02,2200 ; U1.48@2499.8,2152.95 2496,2152 2468,2152 2456,2164 2304,2164 2272,2196 2230.02,2196 ; 2221.02,2200 2230.02,2196 ; 2221.02,2200 2232,2213.02 2230.02,2196
XOUT: C21.1 U1.35 Y1.3 | length 247.7
  Top w8: Y1.3@2512,2552 Y1.3@2511.42,2554.72 2512,2560 2512,2554 2558,2554 ; C21.1@2584,2606.5 2584,2608 2584,2579.89 2558.11,2554 2558,2554 ; U1.35@2600.2,2450.2 2600,2456 2600,2490.11 2574.11,2516 2574,2516 2558,2532 2558,2554
XOUT32: C23.1 U1.49 | length 389.3
  Top w8: C23.1@2161.5,2096 2229.02,2096 ; U1.49@2499.8,2133.27 2496,2133.27 2496,2134 2458,2134 2444,2148 2320,2148 2272,2100 2247.98,2100 ; 2229.02,2096 2247.98,2100 ; 2229.02,2096 2232,2090.98 2247.98,2100
XT1: C39.1 IC6.1 R9.1 Y4.1 | length 530.3
  Top w10: C39.1@1317.5,1728 R9.1@1358.5,1728 ; Y4.1@1330.72,1591.58 1339.58,1591.58 1376,1628 1376,1688 1360,1704 1360,1726.5 R9.1@1358.5,1728 ; IC6.1@1619.54,1836.9 1504.9,1836.9 1460,1792 1436,1792 1408,1764 1368,1764 1358.5,1754.5 R9.1@1358.5,1728
XT2: C40.1 IC6.2 R9.2 Y4.3 | length 353.4
  Top w10: R9.2@1396,1730.5 R9.2@1393.5,1728 C40.1@1434.5,1728 ; Y4.3@1421.28,1664.42 1421.28,1714.78 C40.1@1434.5,1728 ; IC6.2@1619.54,1817.21 1521.21,1817.21 1476,1772 1448,1772 1434.5,1758.5 C40.1@1434.5,1728
XUSB: C26.1 F1.2 U1.39 USB1.1@1161.3,2551.18 | length 2096.3
  Top w10: USB1.1@1161.3,2551.18 USB1.1@1174.02,2551.18 ; C26.1@1433.5,2732 1436,2732 1468,2764 1744,2764 1784,2724 1832,2724 1892,2784 2160,2784 2168,2776 2368,2776 2380,2768 v1(2384,2768) ; v1(2440,2328) 2441.88,2330.12 U1.39@2499.8,2330.12
  Top w12: F1.2@1417.23,2606 1433.5,2642.27 C26.1@1433.5,2732
  Top w15.75: USB1.1@1176,2551 1229.87,2551
  Top w16: USB1.1@1175,2551 USB1.1@1176,2551 ; 1229.87,2551 1242,2564.13 1242,2572.13
  Top w32: 1242,2572.13 1242,2638 1304,2700 1344,2700 1396,2648 1396,2607.23 F1.2@1417.23,2606
  Bottom w10: v1(2384,2768) 2396,2768 2428,2736 2428,2336 2436,2328 v1(2440,2328)
XVCC: F2.2 J3.P1 | length 254.9
  Top w16: J3.P1@1161,1927 1191,1927 1212,1948 1212,2099.23 F2.2@1168,2099.23
pads on no net: FID1.P$1 FID2.P$1 FID3.P$1 FID4.P$1 IC6.5 IC6.6 IC6.7 IC6.12 IC6.14 IC6.25 J3.P4 JTAG.7 POWER.1 R99.P$1 R99.P$2 RN5.3 RN5.4 RN5.5 RN5.6 U1.50 U1.69 U1.93 U1.117 U1.131 U1.138 U1.141 U1.143 USB1.1@999.88,2406.5 USB1.1@999.88,2593.5 USB1.1@1023.5,2406.5 USB1.1@1023.5,2593.5 USB1.1@1039.25,2406.5 USB1.1@1039.25,2593.5 USB1.1@1055,2406.5 USB1.1@1055,2593.5 X2.4 X2.5 X2.6 X2.7 X2.8 X2.9
copper on no net: | length 1060.2
  Top w10: 1172,2474 cw(c1172.99,2473.01) 1172.99,2474.41 ; 1174.02,2551.18 ccw(c1175.23,2553.48) 1176,2551 ; 1175.01,2525.59 ccw(c1175.01,2526.99) 1176,2526 ; 1330.5,2536 cw(c1319.98,2509.38) 1346.35,2520.51 ; 1335.64,2472 cw(c1334.64,2452.64) 1354,2451.64 ccw(c1367.64,2445.64) 1361.64,2432 ; 1353.35,2509.17 ccw(c1409.44,2558.78) 1405.58,2484 cw(c1412.75,2283.03) 1549.79,2430.21 ; 1362,2432 ccw(c1367,2445) 1380,2440 cw(c1398,2440) 1398,2458 cw(c1395,2443) 1410,2440 ; 1410,2430 ccw(c1422,2428) 1420,2416 ccw(c1420,2434) 1438,2434 cw(c1453,2433) 1454,2448 cw(c1450,2432) 1466,2428 ccw(c1482,2420) 1474,2404 ccw(c1478,2422) 1496,2418 cw(c1508.73,2397.89) 1522.43,2417.35 ; 1456.34,2238 cw(c1460.09,2230) 1468.09,2233.75 ; 1621.36,2358.64 ccw(c1664.95,2393.41) 1658.71,2338 ; 1622.66,2317.45 ccw(c1639.46,2332.6) 1638.46,2310 ; 1789.49,2338 ccw(c1791.56,2348.73) 1797.68,2339.68 cw(c1804.11,2328.66) 1807.36,2341 ; 1805.64,2310 ccw(c1809.89,2324.76) 1817.32,2311.32 ; 1825.68,2311.68 cw(c1829.11,2307.9) 1829.36,2313 ; 2038.29,2341 ccw(c2040.54,2375.92) 2063.64,2349.64 ; 2058.64,2313 ccw(c2055.82,2344.83) 2080.32,2324.32 ; 2123.86,2409.86 cw(c2140.55,2392.24) 2141.21,2416.5 ; 2132.68,2376.68 cw(c2144.94,2365.24) 2144.36,2382 ; 2165.48,2416.5 ccw(c2165.47,2441.5) 2180.75,2421.71 ; 2179.04,2382 ccw(c2179.87,2391.98) 2186.34,2384.34 cw(c2202.01,2372.67) 2199.18,2392 ; 2184.75,2424.79 cw(c2198.56,2404.5) 2200.02,2429 ; 2216,2392 cw(c2218,2382) 2228,2384 ccw(c2234,2386) 2236,2380 ; 2252,2380 ccw(c2256,2392) 2268,2388 cw(c2280,2384) 2284,2396 ; 2369.64,2396 cw(c2369.14,2372.21) 2386.32,2388.68 ; 2382.17,2429 cw(c2382.65,2405.47) 2401.48,2419.58 ccw(c2421.18,2436.19) 2423.18,2410.5 ; 2389.68,2383.32 ccw(c2400.36,2384.1) 2393.36,2376 ; 2399.1,2375 ccw(c2401.61,2412.73) 2405.89,2375.16 ; 2412,2376 cw(c2412.12,2361.33) 2417.44,2375 ; 2505.86,2410 cw(c2506.62,2377.69) 2528.93,2401.07 ; 2530.82,2349.8 ccw(c2532.24,2358.89) 2537.66,2351.46 ; 2538.34,2391.66 cw(c2520.43,2370.58) 2548,2372.82 ; 2546.34,2362.14 ccw(c2538.91,2367.56) 2548,2368.98 ; 2467.66,2370.34 ccw(c2468.48,2371.16) 2468.48,2370 cw(c2468.48,2371.16) 2467.66,2370.34
  Top w16: 1172,2412 ccw(c1171.5,2419.5) 1179,2420
  Top w32: 1168,2409 ccw(c1168.5,2412.5) 1172,2412
  Top w40: 1173.11,2405.51 ccw(c1175.12,2410.39) 1180,2408.39 ; 1173.11,2594.49 cw(c1175.12,2589.61) 1180,2591.61 ; 1180,2591 ccw(c1183.5,2591.5) 1184,2588

## Polygon pours and split planes (outlines as drawn)
+5V on Top "Top-+5V" (solid, remove dead copper, pour order 0): 4129.66,1952 3970.34,1952 3880,1861.66 3880,1734.34 3890.34,1724 4148,1724 4148,1933.66
GND on Top "Top-GND" (solid, remove dead copper, pour order 4): 5023,3123 5023,977 957,977 957,3080.02 cw(c1000.31,3079.69) 999.98,3123
VIN on Top "Top-VIN" (solid, remove dead copper, pour order 8): 4457.66,1656 4346.34,1656 4308,1617.66 4308,1532 4349.66,1532 4360,1542.34 4360,1566.34 4369.66,1576 4453.66,1576 4464,1586.34 4464,1649.66
+3V3 on Top "Top-+3V3" (solid, remove dead copper, pour order 12): 3808,2224 3808,2288 4134.24,2288 4226.24,2388 4405.66,2388 4472,2321.66 4472,2166.13 4445.48,2144.02 4212.03,2140 4202.34,2140 4138.34,2204 3930.34,2204 3910.34,2224
SW on Top "Top-SW" (solid, remove dead copper, pour order 16): 4372,1960 4258.4,1960 4168,1873.71 4168,1686 4186.67,1672 4214.34,1672 4228,1658.34 4228,1564 4292,1564 4292,1798.34 4372,1878.34
+5V on Bottom "Bottom-+5V" (solid, remove dead copper, pour order 2): 3920,2205.66 3920,2118.34 3932,2106.34 3932,1926.34 3984,1874.34 3984,1774.34 3994.34,1764 4053.66,1764 4064,1774.34 4064,2046.34 4128,2110.34 4128,2478.34 4137.66,2488 4213.66,2488 4244,2518.34 4244,2584 4048,2584 4048,2245.66 4022.34,2220 3934.34,2220
GND on Bottom "Bottom-GND" (solid, remove dead copper, pour order 6): 979.71,3163 5063,3163 5063,937 937,937 937,3099.71 cw(c990,3110)
VIN on Bottom "Bottom-VIN" (solid, remove dead copper, pour order 10): 4307,1641 4373,1641 4373,1535 4307,1535
+3V3 on Bottom "Bottom-+3V3" (solid, remove dead copper, pour order 14): 4239,2333 4413,2333 4413,2183 4239,2183 4239,2324

## Keep-outs
Top:
  circle w16: c3600,1300 r100
  circle w12: c1600,3000 r100
  circle w12: c3600,2400 r100
  circle w12: c4550,3000 r100
  circle w12: c4800,1100 r100
  circle w12: c1550,1100 r100
  lines w10: 1968,2400 1968,2436
  lines w12: 1856,2552 1856,2400 1908,2400 ; 1856,2600 1856,2636 ; 1968,2548 1968,2584
Bottom:
  circle w16: c3600,1300 r100
  circle w12: c1600,3000 r100
  circle w12: c3600,2400 r100
  circle w12: c4550,3000 r100
  circle w12: c4800,1100 r100
  circle w12: c1550,1100 r100
  lines w10: 1968,2400 1968,2436
  lines w12: 1856,2400 1856,2436 ; 1856,2600 1856,2636 ; 1868,2400 1904,2400 ; 1968,2548 1968,2584
Keep-Out Layer:
  the board outline again, w10

## Silkscreen, mask and mechanical layers (free items; w line width, h text height)
Top Overlay:
  circle w12: c1840,2022 r7.07
  lines w8: 1948,2682 1948,2716 1956,2716 1956,2684 1984,2656 2012,2656 2012,2648 1982,2648 1948,2682
  lines w12: 2155,2810 2190,2775 2600,2775 ; 2820,2775 3260,2775 3300,2815 ; 2977,1264 3005,1292 3125,1292 ; 3405,2660 3450,2615 3500,2615 ; 3808,1292 4221,1292 4244,1269 ; 4285,2615 4355,2615 4400,2660 ; 4495,1905 4495,1445 4535,1405 ; 4495,2320 4495,2860 4535,2900 ; 4700,1225 4700,1205 4800,1205 4800,1225 ; 4700,3050 4700,3075 4800,3075 4800,3050
  lines w16: 3375,2800 3400,2850 3425,2800 ; 3375,2800 3400,2800 ; 3375,2800 3400,2825 ; 3400,2800 3400,2825 ; 3400,2800 3425,2800 ; 3400,2825 3425,2800 ; 3475,2850 3500,2850 ; 3475,2850 3500,2800 3525,2850 ; 3475,2850 3500,2825 ; 3500,2825 3525,2850 ; 3500,2825 3500,2850 ; 3500,2850 3525,2850
  text "MADE IN" at 2788,3186 h51
  text "ITALY" at 3211,3186 h51
  text "5V" at 4617.69,3047.61 h37.4
  text "9" at 2575,2875 h47.6 r90
  text "8" at 2675,2875 h47.6 r90
  text "7" at 2825,2875 h47.6 r90
  text "6" at 2925,2875 h47.6 r90
  text "5" at 3025,2875 h47.6 r90
  text "4" at 3125,2875 h47.6 r90
  text "3" at 3225,2875 h47.6 r90
  text "2" at 3325,2875 h47.6 r90
  text "1" at 3425,2875 h47.6 r90
  text "0" at 3525,2875 h47.6 r90
  text "22" at 4550,2875 h47.6
  text "14" at 3725,2840 h47.6 r90
  text "15" at 3825,2840 h47.6 r90
  text "16" at 3925,2840 h47.6 r90
  text "17" at 4025,2840 h47.6 r90
  text "18" at 4125,2840 h47.6 r90
  text "19" at 4225,2840 h47.6 r90
  text "20" at 4325,2840 h47.6 r90
  text "21" at 4425,2840 h47.6 r90
  text "13" at 2175,2825 h47.6 r90
  text "12" at 2275,2825 h47.6 r90
  text "11" at 2375,2825 h47.6 r90
  text "10" at 2475,2825 h47.6 r90
  text "GND" at 2079.25,2790.48 h47.6 r90
  text "24" at 4550,2775 h47.6
  text "SCL1" at 1781.83,2743.48 h47.6 r90
  text "SDA1" at 1873.83,2743.48 h47.6 r90
  text "AREF" at 1973.83,2743.48 h47.6 r90
  text "PWM" at 2625,2742 h56.1
  text "26" at 4550,2675 h47.6
  text "TX" at 3425,2670 h47.6 r90
  text "RX" at 3525,2670 h47.6 r90
  text "TX0" at 3725,2670 h47.6 r90
  text "RX0" at 3825,2670 h47.6 r90
  text "TX1" at 3925,2670 h47.6 r90
  text "RX1" at 4025,2670 h47.6 r90
  text "TX2" at 4125,2670 h47.6 r90
  text "RX3" at 4225,2670 h47.6 r90
  text "SDA" at 4325,2670 h47.6 r90
  text "SCL" at 4425,2670 h47.6 r90
  text "28" at 4550,2575 h47.6
  text "30" at 4550,2475 h47.6
  text "31" at 4875,2475 h47.6
  text "32" at 4550,2375 h47.6
  text "33" at 4875,2375 h47.6
  text "34" at 4550,2275 h47.6
  text "35" at 4875,2275 h47.6
  text "1" at 3445.51,2187.03 h42.5
  text "36" at 4550,2175 h47.6
  text "37" at 4875,2175 h47.6
  text "38" at 4550,2075 h47.6
  text "39" at 4875,2075 h47.6
  text "40" at 4550,1975 h47.6
  text "41" at 4875,1975 h47.6
  text "DIGITAL" at 4525,1925 h56.1 r90
  text "42" at 4550,1875 h47.6
  text "43" at 4850,1875 h47.6
  text "44" at 4550,1775 h47.6
  text "45" at 4850,1775 h47.6
  text "46" at 4550,1675 h47.6
  text "47" at 4875,1675 h47.6
  text "48" at 4550,1575 h47.6
  text "49" at 4875,1575 h47.6
  text "Arduino" at 3358,1484 h68
  text "50" at 4550,1475 h47.6
  text "51" at 4875,1475 h47.6
  text "52" at 4550,1375 h47.6
  text "53" at 4875,1375 h47.6
  text "DUE" at 3482,1374 h76.5
  text "Arduino.cc" at 3787,1349 h55.25
  text "ANALOG   IN" at 3151,1254 h56.1
  text "GND" at 4840,1200 h47.6
  text "0" at 3030,1185 h47.6 r90
  text "1" at 3120,1185 h47.6 r90
  text "2" at 3230,1185 h47.6 r90
  text "3" at 3330,1185 h47.6 r90
  text "4" at 3430,1185 h47.6 r90
  text "5" at 3525,1185 h47.6 r90
  text "6" at 3625,1185 h47.6 r90
  text "7" at 3730,1185 h47.6 r90
  text "8" at 3930,1185 h47.6 r90
  text "9" at 4030,1185 h47.6 r90
  text "10" at 4130,1185 h47.6 r90
  text "11" at 4222,1185 h47.6 r90
  text "5V" at 2459.48,1168.17 h47.6
  text "GND" at 2579.48,1168.17 h47.6
  text "VIN" at 2751.48,1168.17 h47.6
  text "IOREF" at 2228.83,1167.48 h47.6 r90
  text "RESET" at 2328.83,1167.48 h47.6 r90
  text "3V3" at 2428.83,1167.48 h47.6 r90
  text "DAC0" at 4318,1161 h34 r90
  text "DAC1" at 4418,1161 h34 r90
  text "CANRX" at 4518,1161 h34 r90
  text "CANTX" at 4613,1161 h34 r90
Dimension:
  the board outline again, w10
ReferenceLC:
  text "PC2" at 3888,1684 h34
  text "PC1" at 1854,1214 h34

## Text inside footprints (layer, text, board x,y; h text height)
IC4: Top Overlay "3" at 4034,2215.81 h49.6 r270; Top Overlay "4" at 4304,2181 h49.6 r270; Top Overlay "1" at 4034,2391.93 h49.6 r270; Top Overlay "2" at 4033.63,2306.81 h49.6 r270
IC6: Top Overlay "1" at 1593.95,1846.74 h49.6
J3: Top Overlay "PCB" at 1005,1685 h62 r270; Bottom Solder "Modify SOLDER PADS" at 905,1625 h49.6 r270
USB1: Top Overlay "PCB" at 961.01,2342.5 h62 r270; Bottom Solder "Modify SOLDER PADS" at 905,2250 h49.6 r270